# Altium PCB manette.PcbDoc
Units mil, origin at the board's own origin, x right, y up, seen from the top; angles counter-clockwise.
Board outline 11400 x 2999.71 mil, 2 copper layers (Top Layer, Bottom Layer); 34 components, 52 nets, 173 pads, 8 vias.
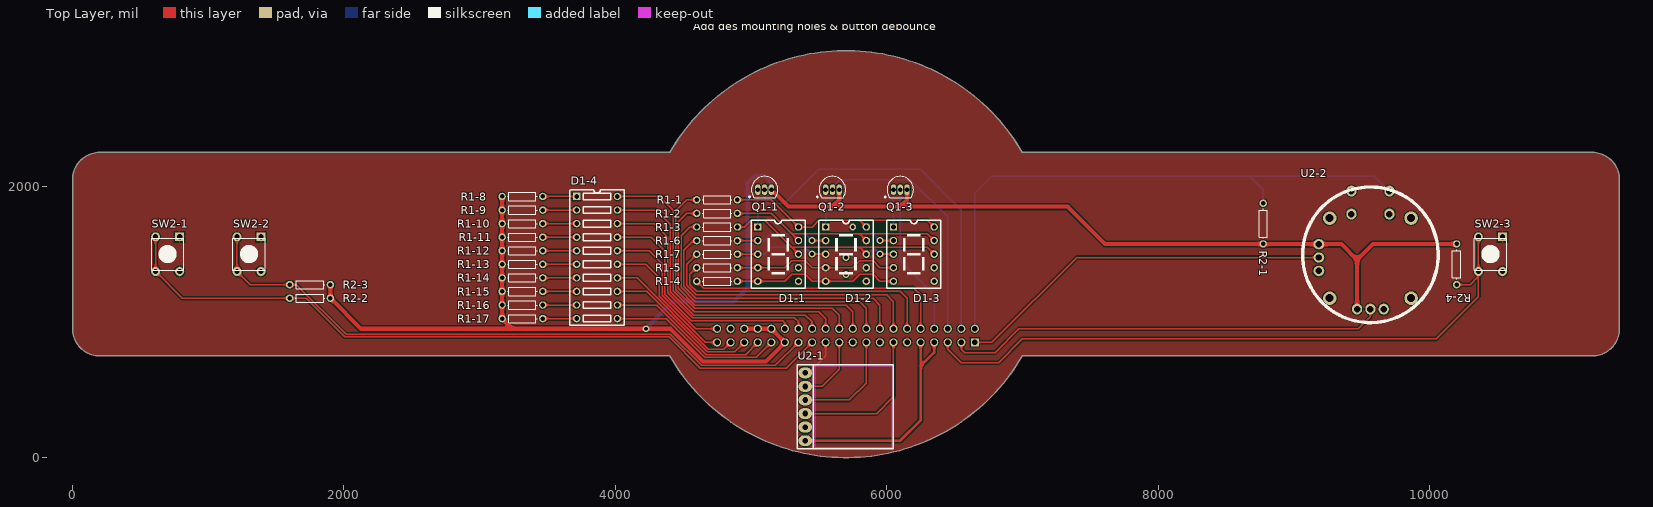
[diagram p0: Top Layer view]
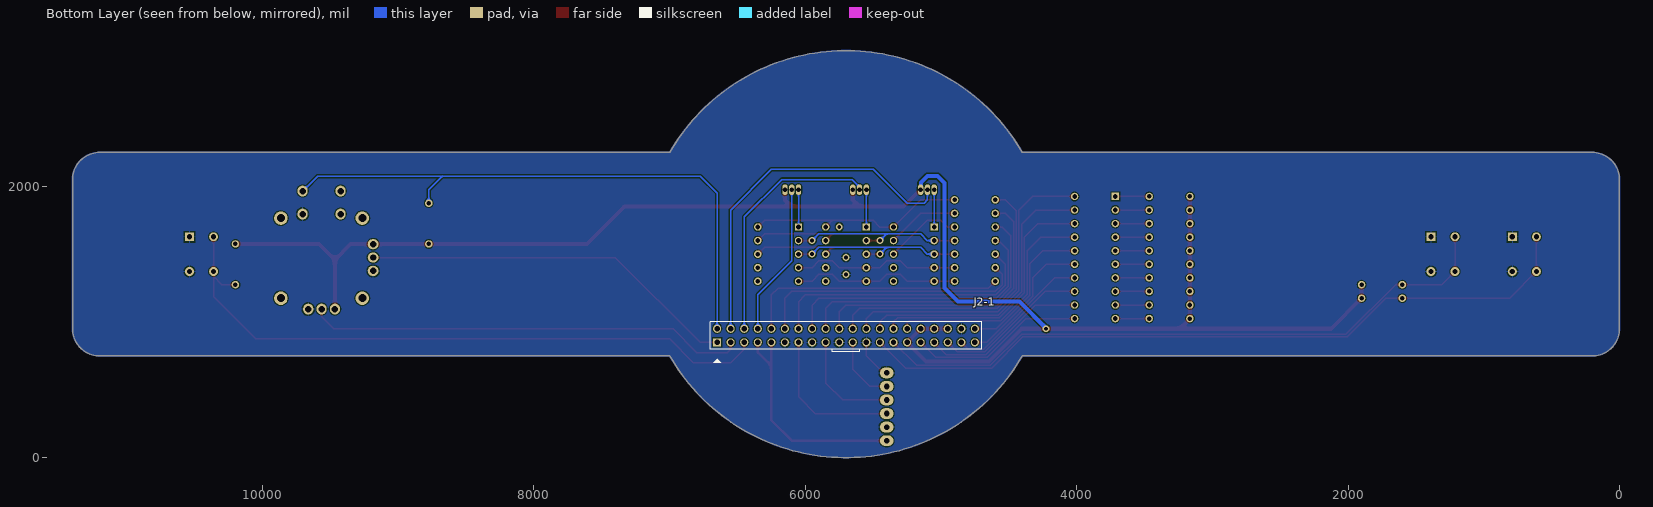
[diagram p1: Bottom Layer view, seen from below]

## Layer stack, top to bottom
Top Solder: solder mask 0.4, Solder Resist, Dk 3.5
Top Layer: signal copper 1.4
Dielectric 1: dielectric 12.6, FR-4, Dk 4.8
Bottom Layer: signal copper 1.4
Bottom Solder: solder mask 0.4, Solder Resist, Dk 3.5

## Board outline
0,950 0,2055 0,2050 cw(c200,2050) 200,2250 195,2250 4400,2250 4400.72,2249.58 cw(c5700,1500) 6999.28,2249.58 7000,2250 11200,2250 cw(c11200,2050) 11400,2050 11400,950 cw(c11200,950) 11200,750 7000,750 6999.28,750.42 cw(c5700,1500) 4400.72,750.42 4400,750 195,750 200,750 cw(c200,950)

## Design rules (kind name [scope] priority, off if disabled: settings)
AssemblyTestPointUsage [All] p1: isadvanced=TRUE
AssemblyTestpoint [All] p1: isadvanced=TRUE testpointundercomponent=TRUE minsize=40 maxsize=100 preferedsize=60 minholesize=0 maxholesize=40 preferedholesize=32 testpointgrid=1 usegrid=TRUE gridtolerance=0.01 allowsidetop=TRUE allowsidebottom=TRUE
Clearance Clearance_1 [OnMid vs OnMid] p1: gap=10 ignorepadtopadclearanceinfootprint=FALSE except(0: Arc-Hole Track-Hole SMDPad-Hole THPad-Hole Via-Hole Fill-Hole Poly-Hole Region-Hole Text-Hole; 7: THPad-Fill THPad-Poly THPad-Region) sourcerule=44 cellrowname=All cellrowtype=0 cellcolname=All cellcoltype=0 innerlayers=TRUE
Clearance Clearance_2 [(ExistsOnLayer('Top Layer') Or ExistsOnLayer('Bottom Layer')) vs (ExistsOnLayer('Top Layer') Or ExistsOnLayer('Bottom Layer'))] p2: gap=10 ignorepadtopadclearanceinfootprint=FALSE except(0: Arc-Hole Track-Hole SMDPad-Hole THPad-Hole Via-Hole Fill-Hole Poly-Hole Region-Hole Text-Hole; 7: THPad-Fill THPad-Poly THPad-Region) sourcerule=44 cellrowname=All cellrowtype=0 cellcolname=All cellcoltype=0 outerlayers=TRUE
Clearance [All] p3: gap=10 ignorepadtopadclearanceinfootprint=FALSE except(0: Arc-Hole Track-Hole SMDPad-Hole THPad-Hole Via-Hole Fill-Hole Poly-Hole Region-Hole Text-Hole) ismatrix=TRUE
ComponentClearance [All] p1: isadvanced=TRUE gap=10 collisioncheckmode=3 verticalgap=10 showdistances=FALSE
FabricationTestPointUsage [All] p1: isadvanced=TRUE valid=0 allowmultiple=FALSE
FabricationTestpoint [All] p1: isadvanced=TRUE side=3 testpointundercomponent=TRUE minsize=40 maxsize=100 preferedsize=60 minholesize=0 maxholesize=40 preferedholesize=32 testpointgrid=1 allowsidetop=TRUE allowsidebottom=TRUE usegrid=TRUE gridtolerance=0.01
FanoutControl Fanout_BGA [IsBGA] p1: isadvanced=TRUE bgadir=Out bgaviamode=Centered fanoutstyle=Auto fanoutdirection=Alternating viagrid=1 // Fanout_BGA (Default Rule)
FanoutControl Fanout_LCC [IsLCC] p2: isadvanced=TRUE bgadir=Out bgaviamode=Centered fanoutstyle=Auto fanoutdirection=Alternating viagrid=1 // Fanout_LCC (Default Rule)
FanoutControl Fanout_SOIC [IsSOIC] p3: isadvanced=TRUE bgadir=Out bgaviamode=Centered fanoutstyle=Auto fanoutdirection=Alternating viagrid=1 // Fanout_SOIC (Default Rule)
FanoutControl Fanout_Small [(CompPinCount < 5)] p4: isadvanced=TRUE bgadir=Out bgaviamode=Centered fanoutstyle=Auto fanoutdirection=OutThenIn viagrid=1 // Fanout_Small (Default Rule)
FanoutControl Fanout_Default [All] p5: isadvanced=TRUE bgadir=Out bgaviamode=Centered fanoutstyle=Auto fanoutdirection=Alternating viagrid=1 // Fanout_Default (Default Rule)
Height [All] p1: isadvanced=TRUE minheight=0 maxheight=1000 prefheight=500
HoleSize [All] p1: isadvanced=TRUE absolutevalues=TRUE maxlimit=100 minlimit=1 maxpercent=80.000 minpercent=20.000
HoleToHoleClearance [All] p1: isadvanced=TRUE gap=10 allowstackedmicrovias=TRUE
LayerPairs [All] p1: isadvanced=TRUE enforce=TRUE
MinimumSolderMaskSliver [All] p1: isadvanced=TRUE minsoldermaskwidth=10
NetAntennae [All] p1: isadvanced=TRUE netantennaetolerance=0
PasteMaskExpansion [All] p1: isadvanced=TRUE expansion=0
PlaneClearance [All] p1: isadvanced=TRUE clearance=20
PlaneConnect [All] p1: isadvanced=TRUE planeconnectstyle=Relief reliefexpansion=20 reliefentries=4 reliefconductorwidth=10 reliefairgap=10
PolygonConnect [All] p1: connectstyle=Relief reliefconductorwidth=10 reliefentries=4 polygonreliefangle="90 Angle" airgapwidth=10
RoutingCorners [All] p1: isadvanced=TRUE cornerstyle=45-Degree minsetback=100 maxsetback=100
RoutingPriority [All] p1: isadvanced=TRUE routingpriority=0
RoutingVias [All] p1: holewidth=28 width=50 viastyle="Through Hole" minholewidth=28 minwidth=50 maxholewidth=28 maxwidth=50
ShortCircuit [All] p1: isadvanced=TRUE allowed=FALSE
SilkToSilkClearance [All] p1: isadvanced=TRUE silktosilkclearance=10
SilkToSolderMaskClearance [IsPad] p1: isadvanced=TRUE minsilkscreentomaskgap=10 clearancetoexposedcopper=TRUE
SolderMaskExpansion [All] p1: isadvanced=TRUE expansion=4 istentingtop=FALSE
SupplyNets "Schematic Supply Nets_5" [InNet('3V3')] p1: isadvanced=TRUE voltage=0.000
SupplyNets "Schematic Supply Nets_4" [InNet('VCC')] p2: isadvanced=TRUE voltage=0.000
SupplyNets "Schematic Supply Nets_3" [InNet('GND')] p3: isadvanced=TRUE voltage=0.000
SupplyNets "Schematic Supply Nets_2" [InNet('3V3')] p4: isadvanced=TRUE voltage=0.000
SupplyNets "Schematic Supply Nets_1" [InNet('GND')] p5: isadvanced=TRUE voltage=0.000
SupplyNets "Schematic Supply Nets" [InNet('VCC')] p6: isadvanced=TRUE voltage=0.000
UnRoutedNet [All] p1: isadvanced=TRUE
UnpouredPolygon [All] p1: isadvanced=TRUE
Width MaxMinWidth_1 [InNet('3V3')] p1: maxlimit=20 minlimit=20 preferedwidth=20 minimp=50.000000 maximp=50.000000 favimp=50.000000
Width MaxMinWidth_2 [InNet('VCC')] p2: maxlimit=30 minlimit=30 preferedwidth=30 minimp=50.000000 maximp=50.000000 favimp=50.000000
Width [All] p3: maxlimit=10 minlimit=10 preferedwidth=10
4 further rules are at their usual default settings.

## Classes and differential pairs
component class Affichages: D1-1 D1-2 D1-3 D1-4 Q1-1 Q1-2 Q1-3 R1-1 R1-2 R1-3 R1-4 R1-5 R1-6 R1-7 R1-8 R1-9 R1-10 R1-11 R1-12 R1-13 R1-14 R1-15 R1-16 R1-17
component class Controles: J2-1 R2-1 R2-2 R2-3 R2-4 SW2-1 SW2-2 SW2-3 U2-1 U2-2

## Components (designator, comment, footprint, x,y, rotation, side; value= is the part's Value field where it differs from the comment)
D1-1 "Hundreds" LED_7SEG_LSHD-A101 5200,1500 r0 top
D1-2 "Tens" LED_7SEG_LSHD-A101 5700,1500 r0 top
D1-3 "Units" LED_7SEG_LSHD-A101 6200,1500 r0 top
D1-4 "RPM Bargraph" LED_BARGRAPH-HDSP-4832 3714.96,1925 r0 top
J2-1 "Header" CONN_HDR_100mils_2x20 6650,850 r180 bottom
Q1-1 "2N3904" TO-92A 5100,1975 r270 top
Q1-2 "2N3904" TO-92A 5600,1975 r270 top
Q1-3 "2N3904" TO-92A 6100,1975 r270 top
R1-1 "Res1" AXIAL-0.3 4750,1900 r180 top value=250
R1-2 "Res1" AXIAL-0.3 4750,1800 r180 top value=250
R1-3 "Res1" AXIAL-0.3 4750,1700 r180 top value=250
R1-4 "Res1" AXIAL-0.3 4750,1300 r180 top value=250
R1-5 "Res1" AXIAL-0.3 4750,1400 r180 top value=250
R1-6 "Res1" AXIAL-0.3 4750,1600 r180 top value=250
R1-7 "Res1" AXIAL-0.3 4750,1500 r180 top value=250
R1-8 "Res1" AXIAL-0.3 3314.96,1925 r180 top value=250
R1-9 "Res1" AXIAL-0.3 3314.96,1825 r180 top value=250
R1-10 "Res1" AXIAL-0.3 3314.96,1725 r180 top value=250
R1-11 "Res1" AXIAL-0.3 3314.96,1625 r180 top value=250
R1-12 "Res1" AXIAL-0.3 3314.96,1525 r180 top value=250
R1-13 "Res1" AXIAL-0.3 3314.96,1425 r180 top value=250
R1-14 "Res1" AXIAL-0.3 3314.96,1325 r180 top value=250
R1-15 "Res1" AXIAL-0.3 3314.96,1225 r180 top value=250
R1-16 "Res1" AXIAL-0.3 3314.96,1125 r180 top value=250
R1-17 "Res1" AXIAL-0.3 3314.96,1025 r180 top value=250
R2-1 "Res1" AXIAL-0.3 8775,1725 r270 top value=4k7
R2-2 "Res1" AXIAL-0.3 1750,1175 r0 top value=4k7
R2-3 "Res1" AXIAL-0.3 1750,1275 r0 top value=4k7
R2-4 "Res1" AXIAL-0.3 10200,1425 r90 top value=4k7
SW2-1 "Clutch Pedal" BUTTON_SPST_WS-TATV 700,1500 r0 top
SW2-2 "Brake Pedal" BUTTON_SPST_WS-TATV 1300,1500 r0 top
SW2-3 "Gas Pedal" BUTTON_SPST_WS-TATV 10450,1500 r0 top
U2-1 "MODULE_ADXL335" MODULE_ADXL335 5400,625 r270 top
U2-2 "Dual-axis joystick" BTN_JOYSTICK_COM-09032 9565,1095 r0 top

## Footprints (in the part's own frame and the unit in brackets; to place one, negate y for a bottom-side part, rotate by r counter-clockwise, add the part's x,y. Pads: shape width x height; smd on the part's side, far side on the other; paste and mask are expansions set on the pad)
AXIAL-0.3 [mm] "Axial Device, Thru-Hole; 2 Leads; 0.3 in Pin Spacing"
  round 1.4 hole 0.85: 1(-3.81,0) 2(3.81,0)
  silkscreen extent -2.77,-0.76 2.77,0.76
BTN_JOYSTICK_COM-09032 [mil] "Dual-axis joystick"
  round 100 hole 59.06: 0(-300,80) 0(-300,670) 0(300,80) 0(300,670)
  oval 75x80 hole 47.24: 0(-140,700) 0(-140,870) SW_A(140,700) SW_B(140,870) X1(98.43,0) X2(0,0) X3(-98.43,0)
  oval 80x75 hole 47.24: Y1(-380,281.57) Y2(-380,380) Y3(-380,478.43)
  silkscreen extent -500,-100 500,900, body extent -525,-147 525,940, height 1190
BUTTON_SPST_WS-TATV [mm] "430186070716"
  round 1.651 hole 1 mask+0.12: 1(2.25,-3.25) 2(-2.25,-3.25) 2(-2.25,3.25)
  rect 1.651x1.651 hole 1 mask+0.12: 1(2.25,3.25)
  silkscreen extent -3,-3 3,3, body extent -3.1,-3.95 3.1,3.95, height 7.06
CONN_HDR_100mils_2x20 [mil]
  rect 60x60 hole 40 mask+4.72: 1(0,0)
  round 60 hole 40 mask+4.72: 2(0,100) 3(100,0) 4(100,100) 5(200,0) 6(200,100) 7(300,0) 8(300,100) 9(400,0) 10(400,100) 11(500,0) 12(500,100) 13(600,0) 14(600,100) 15(700,0) 16(700,100) 17(800,0) 18(800,100) 19(900,0) 20(900,100) 21(1000,0) 22(1000,100) 23(1100,0) 24(1100,100) 25(1200,0) 26(1200,100) 27(1300,0) 28(1300,100) 29(1400,0) 30(1400,100) 31(1500,0) 32(1500,100) 33(1600,0) 34(1600,100) 35(1700,0) 36(1700,100) 37(1800,0) 38(1800,100) 39(1900,0) 40(1900,100)
  silkscreen extent -50,-150 1950,150, body extent -200,-125 2100,240, height 350
LED_7SEG_LSHD-A101 [mil] "7segment display, DIP-10"
  rect 55x55 hole 35: 1(-150,200)
  round 55 hole 35: 2(-150,100) 3(-150,0) 4(-150,-100) 5(-150,-200) 6(150,-200) 7(150,-100) 8(150,0) 9(150,100) 10(150,200)
  silkscreen extent -200,-250 200,250, body extent -200,-250 200,250, height 351
LED_BARGRAPH-HDSP-4832 [mil] "Bargraph 1x10, DIP-20"
  rect 55x55 hole 35: 1(0,0)
  round 55 hole 35: 2(0,-100) 3(0,-200) 4(0,-300) 5(0,-400) 6(0,-500) 7(0,-600) 8(0,-700) 9(0,-800) 10(0,-900) 11(300,-900) 12(300,-800) 13(300,-700) 14(300,-600) 15(300,-500) 16(300,-400) 17(300,-300) 18(300,-200) 19(300,-100) 20(300,0)
  silkscreen extent -50,-950 350,50, body extent -50,-950 350,50, height 240
MODULE_ADXL335 [mil]
  oval 80x100 hole 42: 1(0,0) 2(100,0) 3(200,0) 4(300,0) 5(400,0) 6(500,0)
  Top Layer keep-out region: -50,70 550,70 550,640 -50,640
  silkscreen extent -60,-60 560,650, body extent -60,-50 560,45, height 335
TO-92A [mm] "TO, Flat Index; 3 In-Line, Axial Leads; Body Dia. 4.5mm; Leads 0.51 x 0.48 mm (max)"
  oval 2x1 hole 0.9: 1(0,-1.27) 2(0,0) 3(0,1.27)
  silkscreen extent -2.48,-2.95 1.5,2.48, body extent -2.48,-2.5 1.5,2.5, height 6.86

## Part data
D1-1 D1-2 D1-3: library part LED_7SEG_LSHD-A101, "LED 7 segment display", Mfg=Lite-On, Mfg_PN=LSHD-A101, Supplier1=Digikey, Supplier1_PN=160-1572-5-ND
D1-4: library part LED_BARGRAPH_HDSP-4832, "LED bargraph", Mfg=Broadcom, Mfg_PN=HDSP-4832, Supplier1=Digikey, Supplier1_PN=516-1236-5-ND
J2-1: library part CONN_DUALROW_2x20, "IDC Boxed Header, Straight, PCB Mount, Polarised, 40 Way, 2x20, 0.1\" Pitch", Mfg=Sullins, Mfg_PN=SBH11-PBPC-D20-ST-BK, Supplier1=Digikey, Supplier1_PN=S9175-ND
Q1-1 Q1-2 Q1-3: "NPN General Purpose Amplifier", ComponentLink1Description="Manufacturer Link", ComponentLink1URL=http://www.fairchildsemi.com/, ComponentLink2Description=Datasheet, ComponentLink2URL=http://www.fairchildsemi.com/ds/2N%2F2N3904.pdf, DatasheetVersion=1997, LatestRevisionDate=15-Jan-2003, LatestRevisionNote="PCB Footprint 'BCY-W3/D4.7' replaced", PackageDescription="TO, Flat Index; 3 In-Line, Axial Leads; Body Dia. 4.5mm; Leads 0.51 x 0.48 mm (max)", PackageReference=TO-92A, PackageVersion=Sep-1998, Published=8-Jun-2000, Publisher="Altium Limited"
R1-1 R1-2 R1-3 R1-4 R1-5 R1-6 R1-7 R1-8 R1-9 R1-10 R1-11 R1-12 R1-13 R1-14 R1-15 R1-16 R1-17 R2-1 R2-2 R2-3 R2-4: "Resistor", LatestRevisionDate=17-Jul-2002, LatestRevisionNote="Re-released for DXP Platform.", PackageDescription="Axial Device, Thru-Hole; 2 Leads; 0.3 in Pin Spacing", PackageReference=AXIAL-0.3, Published=8-Jun-2000, Publisher="Altium Limited"
SW2-1 SW2-2 SW2-3: library part BTN_SPST, "SPST Button", Mfg=Wurth, Mfg_PN=430186070716, Supplier1=Digikey, Supplier1_PN=430186070716-ND
U2-1: "Accelerometre"
U2-2: library part BTN_JOYSTICK_COM-09032, "Joystick deux-axes, sorties \"potentiometres\"", Mfg=Sparkfun, Mfg_PN=COM-09032, Supplier1=Digikey, Supplier1_PN=1568-1526-ND

## Via types
v1: diameter 50, hole 28, Top Layer to Bottom Layer, 8 vias

## Nets (pads, with @x,y where several pads share a name; then routed paths per layer and width w, separated by ;. In a path a pad name is that pad's centre, name@x,y a point inside that pad or via, vN(x,y) a via of type N, cw(c..) or ccw(c..) an arc to the next point about the centre after c; other vN are vias at no path point)
3V3: J2-1.7 J2-1.9 U2-1.6 | length 1703.6
  Top Layer w20: U2-1.6 6100,125 6250,275 6250,300 6250,675 ; J2-1.9 6250,675 ; J2-1.7 6350,775 6250,675
7seg_A: J2-1.22 R1-1.2 | length 2152.7
  Top Layer w10: R1-1.2 4525,1900 4445,1820 4445,1238.58 4583.58,1100 5600,1100 5650,1050 J2-1.22
7seg_B: J2-1.20 R1-2.2 | length 2134.2
  Top Layer w10: R1-2.2 4525,1800 4465,1740 4465,1246.86 4586.86,1125 5700,1125 5750,1075 J2-1.20
7seg_C: J2-1.18 R1-3.2 | length 2101
  Top Layer w10: R1-3.2 4550,1700 4485,1635 4485,1255.15 4590.15,1150 5800,1150 5850,1100 J2-1.18
7seg_D: J2-1.10 R1-4.2 | length 1941.4
  Top Layer w10: R1-4.2 4650,1250 6200,1250 6250,1200 J2-1.10
7seg_E: J2-1.12 R1-5.2 | length 2012.1
  Top Layer w10: R1-5.2 4550,1350 4550,1275 4600,1225 6100,1225 6150,1175 J2-1.12
7seg_F: J2-1.16 R1-6.2 | length 2067.9
  Top Layer w10: R1-6.2 4575,1600 4505,1530 4505,1263.43 4593.43,1175 5900,1175 5950,1125 J2-1.16
7seg_G: J2-1.14 R1-7.2 | length 2034.8
  Top Layer w10: R1-7.2 4525,1425 4525,1271.72 4596.72,1200 6000,1200 6050,1150 J2-1.14
Accelerometer_Xout: J2-1.13 U2-1.4 | length 1101.8
  Top Layer w10: U2-1.4 5925,325 6050,450 J2-1.13
Accelerometer_Yout: J2-1.17 U2-1.3 | length 801.8
  Top Layer w10: U2-1.3 5725,425 5850,550 J2-1.17
Accelerometer_Zout: J2-1.21 U2-1.2 | length 501.8
  Top Layer w10: U2-1.2 5525,525 5650,650 J2-1.21
Bar_Graph_1: D1-4.20 J2-1.24 | length 2331.2
  Top Layer w10: D1-4.20 4325,1925 4425,1825 4425,1230.29 4580.29,1075 5500,1075 5550,1025 J2-1.24
Bar_Graph_2: D1-4.19 J2-1.26 | length 2118.5
  Top Layer w10: D1-4.19 4300,1825 4405,1720 4405,1222.01 4577.01,1050 5400,1050 5450,1000 J2-1.26
Bar_Graph_3: D1-4.18 J2-1.28 | length 1926.3
  Top Layer w10: D1-4.18 4285,1725 4385,1625 4385,1213.73 4568.73,1030 5320,1030 5350,1000 J2-1.28
Bar_Graph_4: D1-4.17 J2-1.30 | length 1728.2
  Top Layer w10: D1-4.17 4265,1625 4365,1525 4365,1205.44 4560.44,1010 5235,1010 5250,995 J2-1.30
Bar_Graph_5: D1-4.16 J2-1.40 | length 1109.6
  Top Layer w10: D1-4.16 4250,1525 4345,1430 4345,1197.16 4592.16,950 J2-1.40
Bar_Graph_6: D1-4.15 J2-1.39 | length 1053
  Top Layer w10: D1-4.15 4225,1425 4325,1325 4325,1188.87 4663.87,850 J2-1.39
Bar_Graph_7: D1-4.14 J2-1.37 | length 1073.2
  Top Layer w10: D1-4.14 4160.59,1325 4685.59,800 4800,800 J2-1.37
Bar_Graph_8: D1-4.13 J2-1.35 | length 1148.4
  Top Layer w10: D1-4.13 4232.31,1225 4677.31,780 4880,780 J2-1.35
Bar_Graph_9: D1-4.12 J2-1.33 | length 1223.5
  Top Layer w10: D1-4.12 4304.02,1125 4669.02,760 4960,760 J2-1.33
Bar_Graph_10: D1-4.11 J2-1.31 | length 1298.7
  Top Layer w10: D1-4.11 4375,1025 4660,740 5040,740 J2-1.31
Brake_Pedal: J2-1.27 R2-3.1 SW2-2.2 | length 4751.6
  Top Layer w10: SW2-2.2@1211.42,1627.95 1211.42,1372.05 1308.46,1275 R2-3.1 1650,1275 2015,910 4405.15,910 4635.15,680 5180,680 J2-1.27
Cathode_A: D1-1.10 D1-2.10 D1-3.10 R1-1.1 | length 1645
  Top Layer w10: R1-1.1 5150,1900 D1-1.10 5450,1700 5500,1750 5800,1750 ; D1-2.10 5800,1750 ; D1-3.10 6300,1750 5800,1750
Cathode_B: D1-1.9 D1-2.9 D1-3.9 R1-2.1 | length 1674.3
  Top Layer w10: R1-2.1 5150,1800 5300,1650 ; D1-1.9 5300,1650 ; D1-2.9 5800,1650 ; D1-3.9 6300,1650 5800,1650 ; 5300,1650 5800,1650
Cathode_C: D1-1.8 D1-2.8 D1-3.8 R1-3.1 | length 1715.7
  Top Layer w10: R1-3.1 4950,1700 5000,1750 5100,1750 5300,1550 ; D1-1.8 5300,1550 ; D1-2.8 5800,1550 ; D1-3.8 6300,1550 5800,1550 ; 5300,1550 5800,1550
Cathode_D: D1-1.5 D1-2.5 D1-3.5 R1-4.1 | length 1232.8
  Top Layer w10: R1-4.1 D1-1.5 5250,1300 5300,1350 5400,1350 5450,1300 D1-2.5 5750,1300 5800,1350 5900,1350 5950,1300 D1-3.5
Cathode_E: D1-1.4 D1-2.4 D1-3.4 R1-5.1 | length 1232.8
  Top Layer w10: R1-5.1 D1-1.4 5250,1400 5300,1450 5400,1450 5450,1400 D1-2.4 5750,1400 5800,1450 5900,1450 5950,1400 D1-3.4
Cathode_F: D1-1.2 D1-2.2 D1-3.2 R1-6.1 | length 1362.1
  Top Layer w10: R1-6.1 D1-1.2 ; v1(5450,1600) D1-2.2 ; v1(5950,1600) D1-3.2
  Bottom Layer w10: D1-1.2 5100,1600 5150,1650 5400,1650 ; v1(5450,1600) 5400,1650 ; v1(5950,1600) 5900,1650 5400,1650
Cathode_G: D1-1.3 D1-2.3 D1-3.3 R1-7.1 | length 1362.1
  Top Layer w10: R1-7.1 D1-1.3 ; v1(5450,1500) D1-2.3 ; v1(5950,1500) D1-3.3
  Bottom Layer w10: D1-1.3 5100,1500 5150,1550 5400,1550 ; v1(5450,1500) 5400,1550 ; v1(5950,1500) 5900,1550 5400,1550
Clutch_Pedal: J2-1.25 R2-2.1 SW2-1.2 | length 5468.1
  Top Layer w10: SW2-1.2@611.42,1627.95 611.42,1372.05 808.46,1175 R2-2.1 1721.72,1175 2006.72,890 4396.86,890 4626.86,660 5260,660 J2-1.25
Gas_Pedal: J2-1.5 R2-4.1 SW2-3.2 | length 4834.8
  Top Layer w10: J2-1.5 6450,800 6550,700 6825,700 7000,875 10050,875 10361.42,1186.42 10361.42,1336.42 ; R2-4.1@10201.48,1273.52 R2-4.1 10300,1275 10361.42,1336.42 ; SW2-3.2@10361.42,1627.95 10361.42,1372.05 10361.42,1336.42
GND: J2-1.11 J2-1.15 J2-1.19 J2-1.23 J2-1.38 SW2-1.1 SW2-2.1 SW2-3.1 U2-1.1 U2-1.5 U2-2.SW_A U2-2.X1 U2-2.Y1 | length 301.8
  Top Layer w10: U2-1.1 5425,625 5550,750 J2-1.23
  other v1: 5700,1350 5700,1475 5750,1700
Hundreds_Enable: J2-1.4 Q1-1.2 | length 2638.2
  Bottom Layer w10: Q1-1.2 5100,1900 5125,1875 5250,1875 5500,2125 6250,2125 6550,1825 J2-1.4
Joystick_Button: J2-1.2 R2-1.1 U2-2.SW_B | length 4393.8
  Bottom Layer w10: J2-1.2 6650,1950 6775,2075 8675,2075 ; R2-1.1 8775,1975 8675,2075 ; U2-2.SW_B 9595,2075 8675,2075
Joystick_Horizontal: J2-1.3 U2-2.X2 | length 3240.1
  Top Layer w10: J2-1.3 6550,800 6575,775 6800,775 6975,950 9475,950 9565,1040 U2-2.X2
Joystick_Vertical: J2-1.1 U2-2.Y2 | length 2793.9
  Top Layer w10: J2-1.1 6775,850 7400,1475 U2-2.Y2
NetD1-1_1: D1-1.1 Q1-1.1 | length 275
  Bottom Layer w10: D1-1.1 Q1-1.1
NetD1-2_1: D1-2.1 Q1-2.1 | length 275
  Bottom Layer w10: D1-2.1 Q1-2.1
NetD1-3_1: D1-3.1 Q1-3.1 | length 275
  Bottom Layer w10: D1-3.1 Q1-3.1
NetD1-4_1: D1-4.1 R1-8.1 | length 250
  Top Layer w10: R1-8.1 D1-4.1
NetD1-4_2: D1-4.2 R1-9.1 | length 250
  Top Layer w10: R1-9.1 D1-4.2
NetD1-4_3: D1-4.3 R1-10.1 | length 250
  Top Layer w10: R1-10.1 D1-4.3
NetD1-4_4: D1-4.4 R1-11.1 | length 250
  Top Layer w10: R1-11.1 D1-4.4
NetD1-4_5: D1-4.5 R1-12.1 | length 250
  Top Layer w10: R1-12.1 D1-4.5
NetD1-4_6: D1-4.6 R1-13.1 | length 250
  Top Layer w10: R1-13.1 D1-4.6
NetD1-4_7: D1-4.7 R1-14.1 | length 250
  Top Layer w10: R1-14.1 D1-4.7
NetD1-4_8: D1-4.8 R1-15.1 | length 250
  Top Layer w10: R1-15.1 D1-4.8
NetD1-4_9: D1-4.9 R1-16.1 | length 250
  Top Layer w10: R1-16.1 D1-4.9
NetD1-4_10: D1-4.10 R1-17.1 | length 250
  Top Layer w10: R1-17.1 D1-4.10
Tens_Enable: J2-1.6 Q1-2.2 | length 1831.5
  Bottom Layer w10: Q1-2.2 5600,1994.69 5655.31,2050 6175,2050 6450,1775 J2-1.6
Units_Enable: J2-1.8 Q1-3.2 | length 1128.6
  Bottom Layer w10: Q1-3.2 6100,1450 6350,1200 J2-1.8
VCC: J2-1.29 J2-1.32 J2-1.34 J2-1.36 Q1-1.3 Q1-2.3 Q1-3.3 R1-8.2 R1-9.2 R1-10.2 R1-11.2 R1-12.2 R1-13.2 R1-14.2 R1-15.2 R1-16.2 R1-17.2 R2-1.2 R2-2.2 R2-3.2 R2-4.2 U2-2.X3 U2-2.Y3 | length 12945.8
  Top Layer w30: R2-3.2 R2-2.2 2125,950 3239.96,950 ; R1-17.2@3162.34,1025 R1-17.2 ; R1-8.2 R1-9.2 R1-10.2 R1-11.2 R1-12.2 R1-13.2 R1-14.2 R1-15.2 R1-16.2 R1-17.2 ; J2-1.36 J2-1.34 J2-1.32 J2-1.29 5110,710 4647.57,710 4407.57,950 v1(4225,950) 3239.96,950 ; Q1-1.3 5150,1957.85 5154.33,1953.52 5171.48,1953.52 5275,1850 5600,1850 ; Q1-2.3 5650,1900 5600,1850 ; Q1-3.3 6150,1900 6100,1850 ; U2-2.X3 9466.57,1458.43 ; R2-4.2 9583.15,1575 9466.57,1458.43 ; R1-17.2 3239.96,950 ; 5600,1850 6100,1850 ; 6100,1850 7334.1,1850 7609.1,1575 R2-1.2 8776.57,1573.43 U2-2.Y3 9351.57,1573.43 9466.57,1458.43
  Bottom Layer w30: v1(4225,950) 4225,953.79 4421.21,1150 4875,1150 4975,1250 4975,2025 5025,2075 5100,2075 5148.21,2026.79 5148.21,1976.79 Q1-1.3
pads on no net: D1-1.6 D1-1.7 D1-2.6 D1-2.7 D1-3.6 D1-3.7 U2-2.0

## Polygon pours and split planes (outlines as drawn)
GND on Bottom Layer "GND_BOT" (solid, remove dead copper, pour order 1): 194.08,745.07 cw(c200,950) -4.67,938.18 -5.01,940 -5.02,2055 -4.93,2055.92 cw(c200,2050) 194.08,2254.93 195,2255.01 200.05,2255.01 4398.07,2255.02 cw(c5700,1500) 7001.93,2255.02 11205,2255.02 11205.92,2254.93 cw(c11200,2050) 11405.01,2050 11405.01,950 11405.01,945 11404.93,944.08 cw(c11200,950) 11211.82,745.33 11210,744.98 7001.93,744.98 cw(c5700,1500) 4398.07,744.99
GND on Top Layer "GND_TOP" (solid, remove dead copper, pour order 3): 0,950 0,2055 0,2050 cw(c200,2050) 200,2250 195,2250 4400,2250 4400.72,2249.58 cw(c5700,1500) 6999.28,2249.58 7000,2250 11200,2250 cw(c11200,2050) 11400,2050 11400,950 cw(c11200,950) 11200,750 7000,750 6999.28,750.42 cw(c5700,1500) 4400.72,750.42 4400,750 195,750 200,750 cw(c200,950)

## Silkscreen, mask and mechanical layers (free items; w line width, h text height)
Top Overlay:
  text "Add des mounting holes & button debounce" at 4575,3150 h60
Mechanical 13:
  lines w10: 0,2050 cw(c200,2050) 200,2250 ; 0,2055 0,950 ccw(c200,950) 200,750 ; 195,750 4400,750 ; 195,2250 4400,2250 ; 4400.72,750.42 ccw(c5700,1500) 6999.28,750.42 ; 4400.72,2249.58 cw(c5700,1500) 6999.28,2249.58 ; 7000,750 11200,750 ccw(c11200,950) 11400,950 11400,2050 ccw(c11200,2050) 11200,2250 ; 7000,2250 11205,2250